# Altium PCB PCB.PcbDoc
Units mil, origin at the board's own origin, x right, y up, seen from the top; angles counter-clockwise.
Board outline 3090 x 2515 mil, 2 copper layers (Top Layer, Bottom Layer); 9 components, 15 nets, 69 pads, 0 vias.
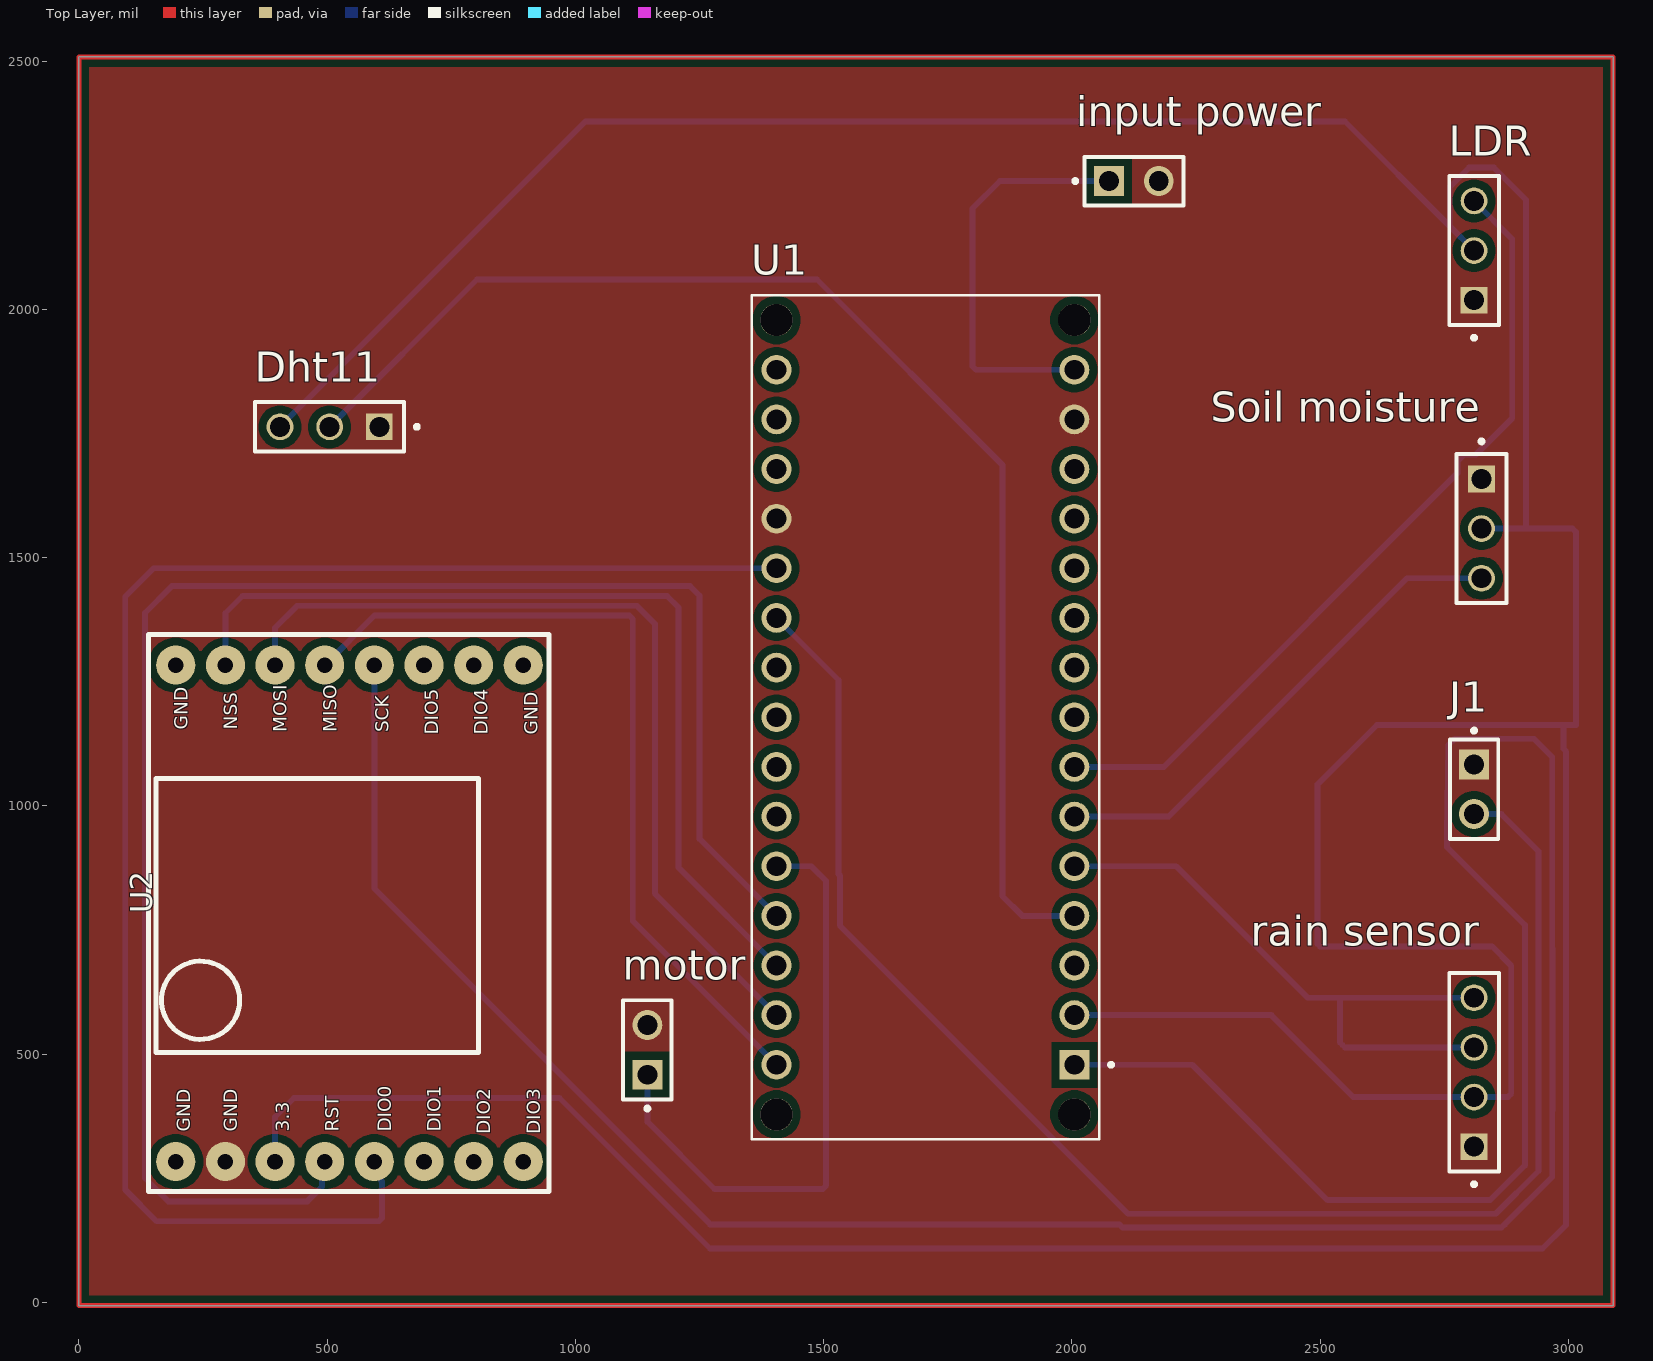
[diagram p0: Top Layer view]
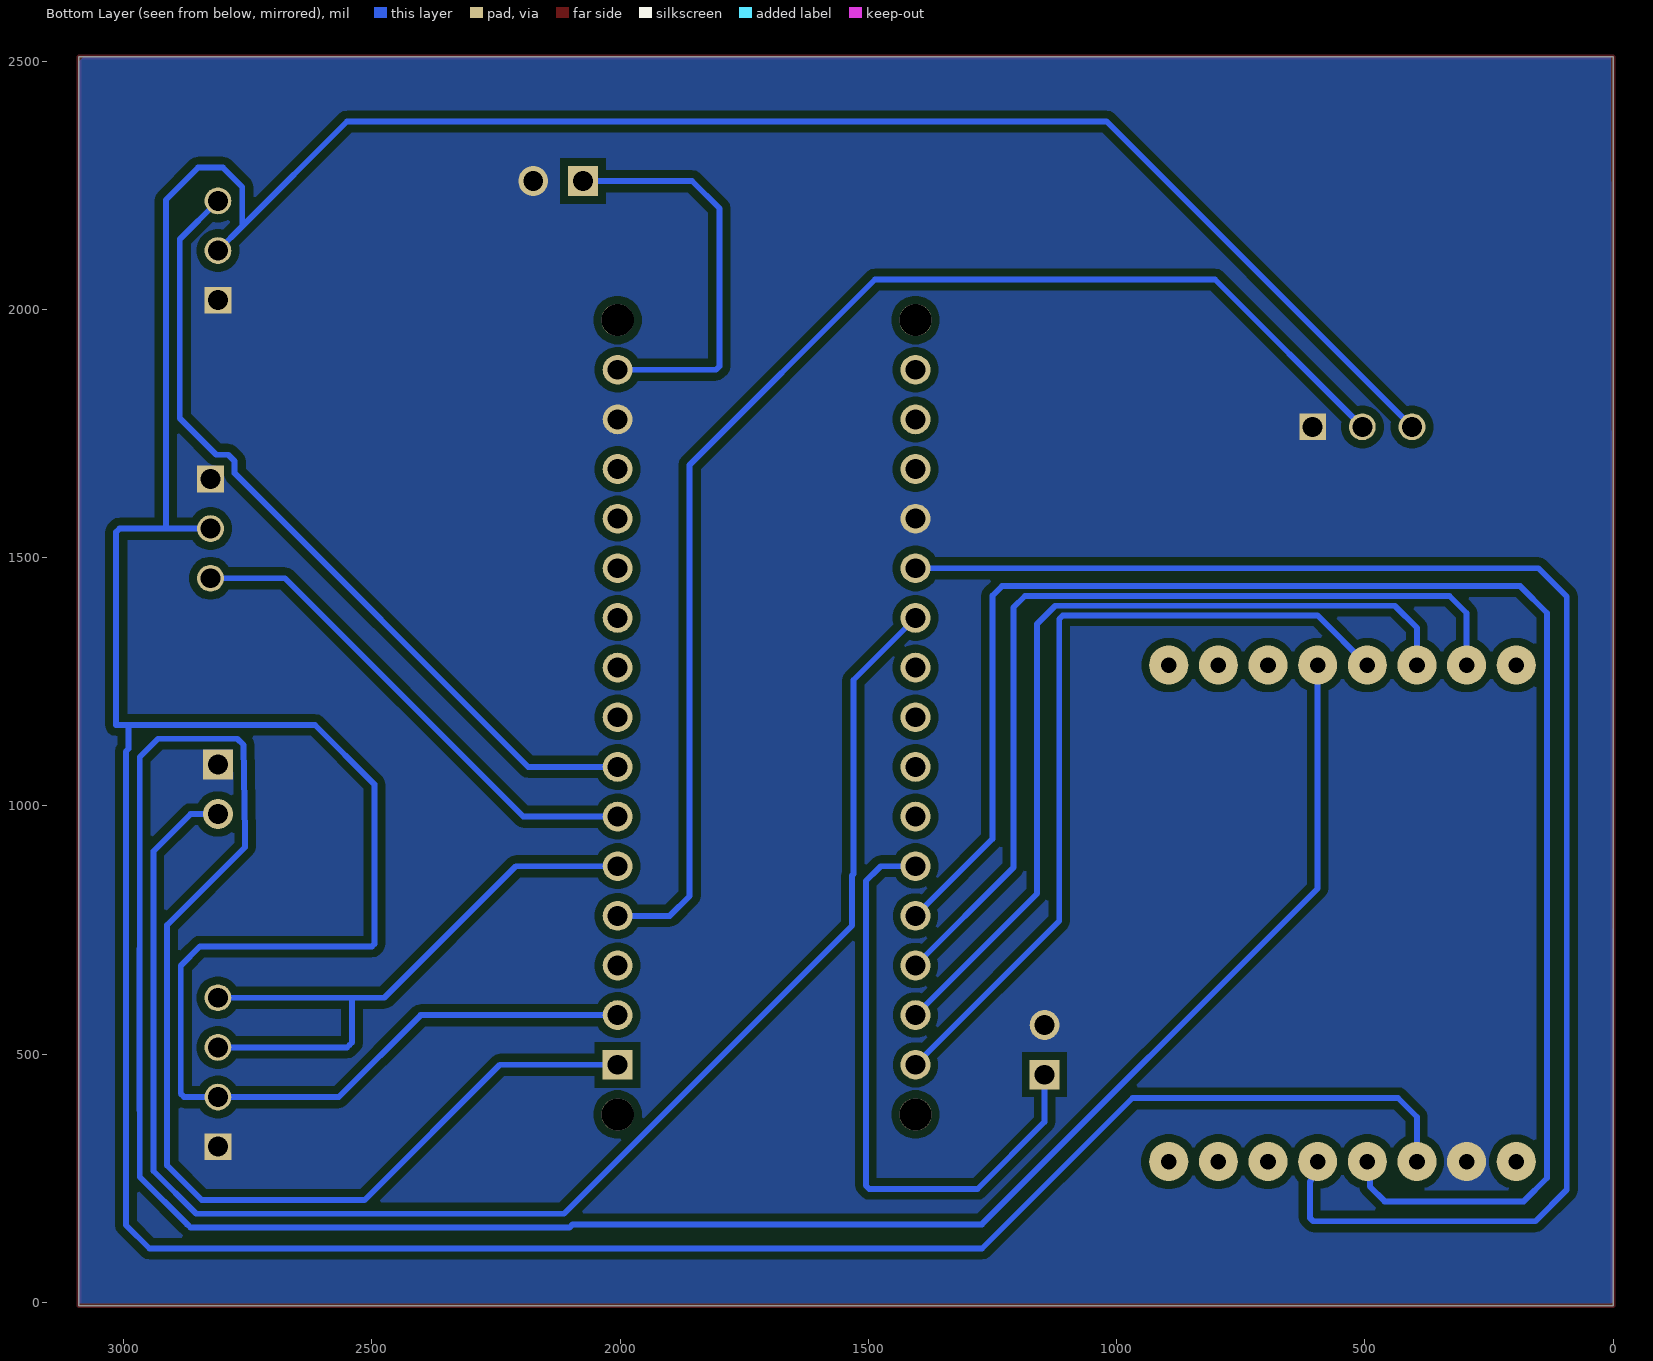
[diagram p1: Bottom Layer view, seen from below]

## Layer stack, top to bottom
Top Solder: solder mask 0.4, Solder Resist, Dk 3.5
Top Layer: signal copper 1.4
Dielectric 1: dielectric 12.6, FR-4, Dk 4.8
Bottom Layer: signal copper 1.4
Bottom Solder: solder mask 0.4, Solder Resist, Dk 3.5

## Board outline
-0.01,-6.55 -0.01,2508.45 3089.99,2508.45 3089.99,-6.55

## Design rules (kind name [scope] priority, off if disabled: settings)
Clearance [All] p1: gap=15.75 ignorepadtopadclearanceinfootprint=FALSE
PolygonConnect PolygonConnect_2 [All vs IsNamedPolygon('NETDHT11_01_L01_P001')] p1: connectstyle=Direct reliefconductorwidth=10 reliefentries=4 polygonreliefangle="90 Angle" airgapwidth=10
PolygonConnect PolygonConnect_1 [All vs IsNamedPolygon('NETDHT11_01_L02_P000')] p2: connectstyle=Direct reliefconductorwidth=10 reliefentries=4 polygonreliefangle="90 Angle" airgapwidth=10
PolygonConnect [All] p3: connectstyle=Relief reliefconductorwidth=10 reliefentries=4 polygonreliefangle="90 Angle" airgapwidth=10
RoutingLayers [All] p1: top layer_v5=FALSE bottom layer_v5=TRUE
RoutingVias [All] p1: holewidth=28 width=50 viastyle="Through Hole" minholewidth=28 minwidth=50 maxholewidth=28 maxwidth=50
SolderMaskExpansion [All] p1: expansion=4 istentingtop=FALSE
Width [All] p1: maxlimit=11.81 minlimit=11.81 preferedwidth=11.81 minimp=50.000000 maximp=50.000000 favimp=50.000000
29 further rules are at their usual default settings.

## Components (designator, comment, footprint, x,y, rotation, side; value= is the part's Value field where it differs from the comment)
Dht11 "TSW-103-17-S-S" SAMTEC_TSW-103-17-S-S 604.99,1763.45 r180 top
"input power" "HMTSW-102-XX-X-S-XXX" SAMTEC_HMTSW-102-XX-X-S-XXX 2124.99,2258.45 r180 top
J1 "led" SAMTEC_HMTSW-102-XX-X-S-XXX 2809.99,1033.45 r90 top
LDR "TSW-103-17-S-S" SAMTEC_TSW-103-17-S-S 2809.99,2018.45 r90 top
motor "HMTSW-102-XX-X-S-XXX" SAMTEC_HMTSW-102-XX-X-S-XXX 1144.99,508.45 r270 top
"rain sensor" "TSW-104-26-F-S" SAMTEC_TSW-104-26-F-S 2809.99,313.45 r90 top
"Soil moisture" "TSW-103-17-S-S" SAMTEC_TSW-103-17-S-S 2824.99,1658.45 r270 top
U1 "ABX00028" MODULE_ABX00028 1704.99,1178.45 r90 top
U2 "LORA-SX1278-SYMBOL" LORA-SX1278 594.99,733.45 r90 top

## Footprints (in the part's own frame and the unit in brackets; to place one, negate y for a bottom-side part, rotate by r counter-clockwise, add the part's x,y. Pads: shape width x height; smd on the part's side, far side on the other; paste and mask are expansions set on the pad)
LORA-SX1278 [mm]
  round 2 hole 0.8 paste-2539.97 mask+0.102: 1(-11.43,10.16) 2(-11.43,7.62) 3(-11.43,5.08) 4(-11.43,2.54) 5(-11.43,0) 6(-11.43,-2.54) 7(-11.43,-5.08) 8(-11.43,-7.62) 9(13.97,-7.62) 10(13.97,-5.08) 11(13.97,-2.54) 12(13.97,0) 13(13.97,2.54) 14(13.97,5.08) 15(13.97,7.62) 16(13.97,10.16)
  silkscreen extent -12.95,-8.94 15.55,11.56
MODULE_ABX00028 [mil]
  rect 60x60 / inner round 60 / far side rect 60x60 hole 40: 1(-700,-300)
  round 60 hole 40: 2(-600,-300) 3(-500,-300) 4(-400,-300) 5(-300,-300) 6(-200,-300) 7(-100,-300) 8(0,-300) 9(100,-300) 10(200,-300) 11(300,-300) 12(400,-300) 13(500,-300) 14(600,-300) 15(700,-300) 16(700,300) 17(600,300) 18(500,300) 19(400,300) 20(300,300) 21(200,300) 22(100,300) 23(0,300) 24(-100,300) 25(-200,300) 26(-300,300) 27(-400,300) 28(-500,300) 29(-600,300) 30(-700,300)
  round 65 hole 65 unplated: ""(-800,-300) ""(-800,300) ""(800,-300) ""(800,300)
  silkscreen extent -850,-378 850,350, body extent -895,-350 850,350, height 236
SAMTEC_HMTSW-102-XX-X-S-XXX [mm]
  rect 1.53x1.53 hole 1.02: 01(1.27,0)
  round 1.53 hole 1.02: 02(-1.27,0)
  silkscreen extent -2.54,-1.24 3.1,1.24
SAMTEC_TSW-103-17-S-S [mm]
  rect 1.37x1.37 hole 1.02: 01(0,0)
  round 1.37 hole 1.02: 02(2.54,0) 03(5.08,0)
  silkscreen extent -2.02,-1.27 6.35,1.27
SAMTEC_TSW-104-26-F-S [mm]
  rect 1.37x1.37 hole 1.02: 01(0,0)
  round 1.37 hole 1.02: 02(2.54,0) 03(5.08,0) 04(7.62,0)
  silkscreen extent -2.02,-1.27 8.89,1.27

## Part data
Dht11 LDR "rain sensor" "Soil moisture": Package=None, Availability=Unavailable, Price=None
  Dht11 LDR "Soil moisture": MP=TSW-103-17-S-S
  "rain sensor": MP=TSW-104-26-F-S
"input power" motor: "Connector Header Through Hole 2 position 0.100\" (2.54mm)", Package=None, Availability=Unavailable, MP=HMTSW-102-XX-X-S-XXX, Price=None
J1: library part HMTSW-102-XX-X-S-XXX, "Connector Header Through Hole 2 position 0.100\" (2.54mm)", Package=None, Availability=Unavailable, MP=HMTSW-102-XX-X-S-XXX, Price=None
U1: "Arduinoâ€™s 5V compatible board in the smallest available form factor: 45x18mm!", Package=None, Availability="Not in stock", Check_prices=https://www.snapeda.com/parts/Arduino%20Nano%20Every/Arduino/view-part/?ref=eda, MF=Arduino, MP="Arduino Nano Every", Price=None, SnapEDA_Link=https://www.snapeda.com/parts/Arduino%20Nano%20Every/Arduino/view-part/?ref=snap
U2: Contributor=iamdecoder, spicePre=U, spiceSymbolName=LORA-SX1278-SYMBOL

## Nets (pads, with @x,y where several pads share a name; then routed paths per layer and width w, separated by ;. In a path a pad name is that pad's centre, name@x,y a point inside that pad or via, vN(x,y) a via of type N, cw(c..) or ccw(c..) an arc to the next point about the centre after c; other vN are vias at no path point)
NetDht11_01: "input power.02" "rain sensor.01" "Soil moisture.01" Dht11.01 J1.01 LDR.01 motor.02 U1.14 U1.19 U2.2
NetDht11_02: Dht11.02 U1.4 | length 2662.5
  Bottom Layer w11.81: Dht11.02 801.7,2060.17 1486.7,2060.17 1859.99,1686.88 1859.99,818.45 1899.99,778.45 U1.4
NetDht11_03: "rain sensor.02" "Soil moisture.02" Dht11.03 LDR.02 U1.2 U2.3 | length 10655.7
  Bottom Layer w11.81: U2.3 394.99,373.45 432.99,411.45 967.99,411.45 1270.99,108.45 2948.07,108.45 2995.11,155.49 2995.11,367.67 2995.22,367.79 2995.22,723.85 2995.11,723.97 2995.11,1109.82 2989.99,1114.94 2989.99,1162.78 ; Dht11.03 1019.99,2378.45 2549.99,2378.45 2760.99,2167.45 ; U1.2 2401.79,578.45 2566.79,413.45 2809.99,413.45 2878.07,413.45 2884.99,420.37 2884.99,678.19 2846.51,716.67 2499.99,716.67 2494.99,721.67 2494.99,1043.45 2614.32,1162.78 2989.99,1162.78 ; LDR.02 2760.99,2167.45 ; 2824.99,1558.45 2914.99,1558.45 ; 2760.99,2167.45 2760.99,2246.45 2799.99,2285.45 2849.99,2285.45 2914.99,2220.45 2914.99,1558.45 ; 2914.99,1558.45 3008.07,1558.45 3014.99,1551.53 3014.99,1162.78 2989.99,1162.78
"Netinput power_01": "input power.01" U1.15 | length 823.7
  Bottom Layer w11.81: U1.15 1806.91,1878.45 1799.99,1885.37 1799.99,2203.45 1854.99,2258.45 2074.99,2258.45
NetJ1_02: J1.02 U1.21 | length 3161
  Bottom Layer w11.81: U1.21 1529.99,1253.45 1529.99,862.43 1532.55,859.87 1532.55,758.89 2112.99,178.45 2853.96,178.45 2939.99,264.48 2939.99,397.42 2940.11,397.54 2940.11,701.02 2939.99,701.14 2939.99,908.45 2864.99,983.45 J1.02
NetLDR_03: LDR.03 U1.7 | length 1657.1
  Bottom Layer w11.81: U1.7 2184.99,1078.45 2776.37,1669.83 2776.37,1694.39 2789.05,1707.07 2813.61,1707.07 2886.99,1780.45 2886.99,2141.45 LDR.03
Netmotor_01: motor.01 U1.26 | length 1239.3
  Bottom Layer w11.81: motor.01 1144.99,363.45 1279.99,228.45 1498.07,228.45 1504.99,235.37 1504.99,848.45 1479.96,873.48 1474.99,878.45 U1.26
"Netrain sensor_03": "rain sensor.03" "rain sensor.04" U1.5 | length 1278.9
  Bottom Layer w11.81: U1.5 2209.99,878.45 2474.99,613.45 2539.99,613.45 ; 2809.99,513.45 2549.99,513.45 2545.01,518.43 2539.99,523.45 2539.99,613.45 ; 2809.99,613.45 2539.99,613.45
"NetSoil moisture_03": "Soil moisture.03" U1.6 | length 1018.8
  Bottom Layer w11.81: U1.6 2194.99,978.45 2674.99,1458.45 2824.99,1458.45
NetU1_1: U1.1 U2.12 | length 6184.2
  Bottom Layer w11.81: U2.12 594.99,833.45 1271.37,157.07 2095.39,157.07 2101.57,150.89 2865.38,150.89 2871.56,157.07 2872.02,157.07 2967.55,252.6 2967.55,386.01 2967.66,386.12 2967.66,712.43 2967.55,712.55 2967.55,1098.4 2930.72,1135.22 2875.73,1135.22 2770.9,1135.22 2758.22,1122.54 2755.35,941.43 2755.35,916.74 2912.43,759.66 2912.43,689.72 2912.55,689.6 2912.55,408.95 2912.43,408.84 2912.43,275.89 2842.55,206.01 2514.59,206.01 2242.15,478.45 U1.1
NetU1_20: U1.20 U2.5 | length 3196.4
  Bottom Layer w11.81: U2.5 607.79,270.65 607.79,245.98 610.71,243.07 610.71,170.37 603.79,163.45 156.4,163.45 93.23,226.63 93.23,1421.69 149.99,1478.45 U1.20
NetU1_27: U1.27 U2.4 | length 3435.5
  Bottom Layer w11.81: U2.4 489.82,278.28 489.82,233.28 459.99,203.45 179.99,203.45 132.99,250.45 132.99,1388.45 187.04,1442.51 1230.93,1442.51 1249.99,1423.45 1249.99,933.45 U1.27
NetU1_28: U1.28 U2.15 | length 1844.5
  Bottom Layer w11.81: U2.15 294.99,1388.45 329.36,1422.82 1184.59,1422.82 1207.88,1399.53 1207.88,875.56 U1.28
NetU1_29: U1.29 U2.14 | length 1763.2
  Bottom Layer w11.81: U2.14 394.99,1358.45 439.67,1403.14 1123.38,1403.14 1159.99,1366.53 1159.99,823.45 U1.29
NetU1_30: U1.30 U2.13 | length 1682.7
  Bottom Layer w11.81: U2.13 594.99,1383.45 1108.5,1383.45 1115.42,1376.53 1115.42,768.02 U1.30
pads on no net: U1. U1.3 U1.8 U1.9 U1.10 U1.11 U1.12 U1.13 U1.16 U1.17 U1.18 U1.22 U1.23 U1.24 U1.25 U2.1 U2.6 U2.7 U2.8 U2.9 U2.10 U2.11 U2.16
copper on no net: | length 11210
  Top Layer w10: -0.01,-6.55 3089.99,-6.55 3089.99,2508.45 -0.01,2508.45 -0.01,-6.55

## Polygon pours and split planes (outlines as drawn)
NetDht11_01 on Top Layer "NETDHT11_01_L01_P001" (solid, pour order 1): 4.99,3.45 14.99,-6.55 3089.99,-6.55 3089.99,2508.45 -0.01,2508.45
NetDht11_01 on Bottom Layer "NETDHT11_01_L02_P000" (solid, pour order 0): -0.01,-6.55 4.99,-1.55 3089.99,-1.55 3089.99,2498.45 3079.99,2508.45 4.99,2508.45

## Text inside footprints (layer, text, board x,y; h text height)
U2: Top Overlay "3.3" at 423.77,343.45 h27.56 r90; Top Overlay "RST" at 523.77,343.45 h27.56 r90; Top Overlay "DIO3" at 928.77,338.45 h27.56 r90; Top Overlay "DIO2" at 828.77,338.45 h27.56 r90; Top Overlay "DIO1" at 728.77,343.45 h27.56 r90; Top Overlay "DIO0" at 628.77,343.45 h27.56 r90; Top Overlay "SCK" at 623.77,1148.45 h27.56 r90; Top Overlay "DIO5" at 723.77,1143.45 h27.56 r90; Top Overlay "DIO4" at 823.77,1143.45 h27.56 r90; Top Overlay "GND" at 923.77,1143.45 h27.56 r90; Top Overlay "MISO" at 518.77,1148.45 h27.56 r90; Top Overlay "MOSI" at 418.77,1148.45 h27.56 r90; Top Overlay "NSS" at 318.77,1153.45 h27.56 r90; Top Overlay "GND" at 218.77,1153.45 h27.56 r90; Top Overlay "GND" at 318.77,343.45 h27.56 r90; Top Overlay "GND" at 223.77,343.45 h27.56 r90